# Altium PCB SAU-G0-EX_AHT-GL.PcbDoc
Units mm, origin at the board's own origin, x right, y up, seen from the top; angles counter-clockwise.
Board outline 18.66 x 19.5 mm, 2 copper layers (Top Layer, Bottom Layer), stack 0.979 mm thick; 22 components, 16 nets, 71 pads, 37 vias.
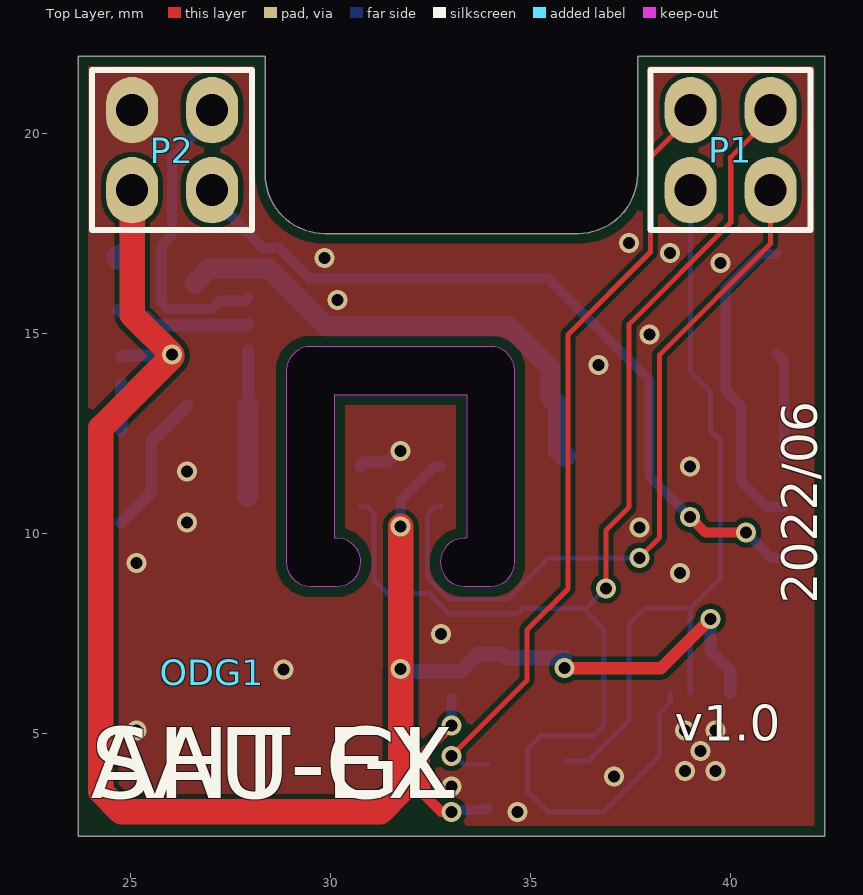
[diagram p0: Top Layer view]
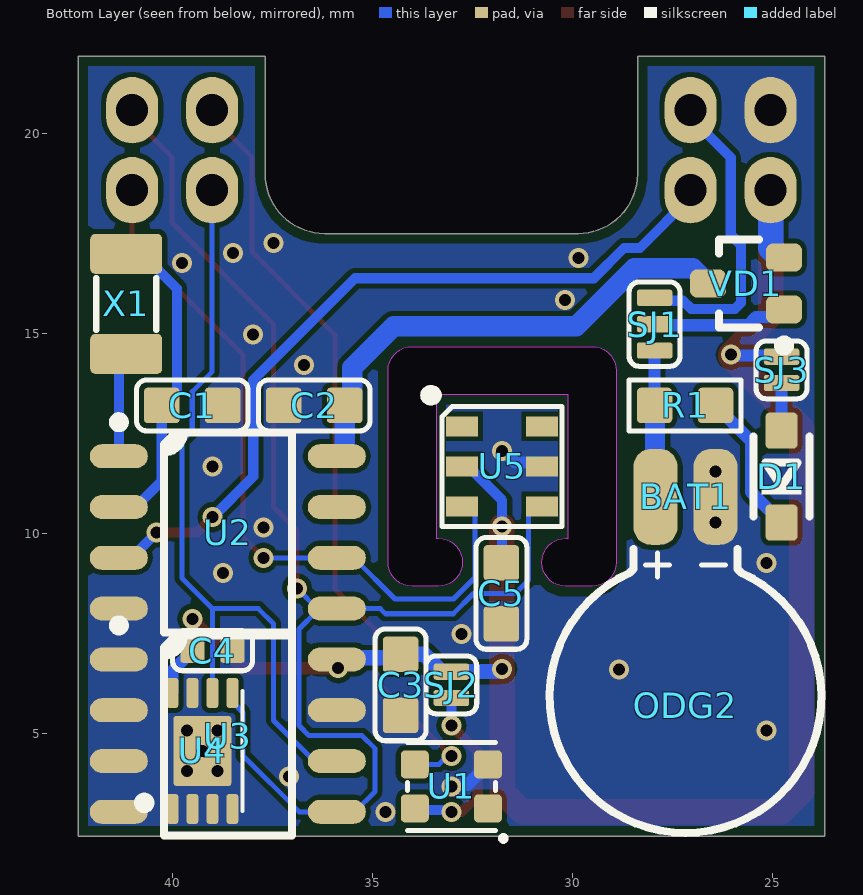
[diagram p1: Bottom Layer view, seen from below]
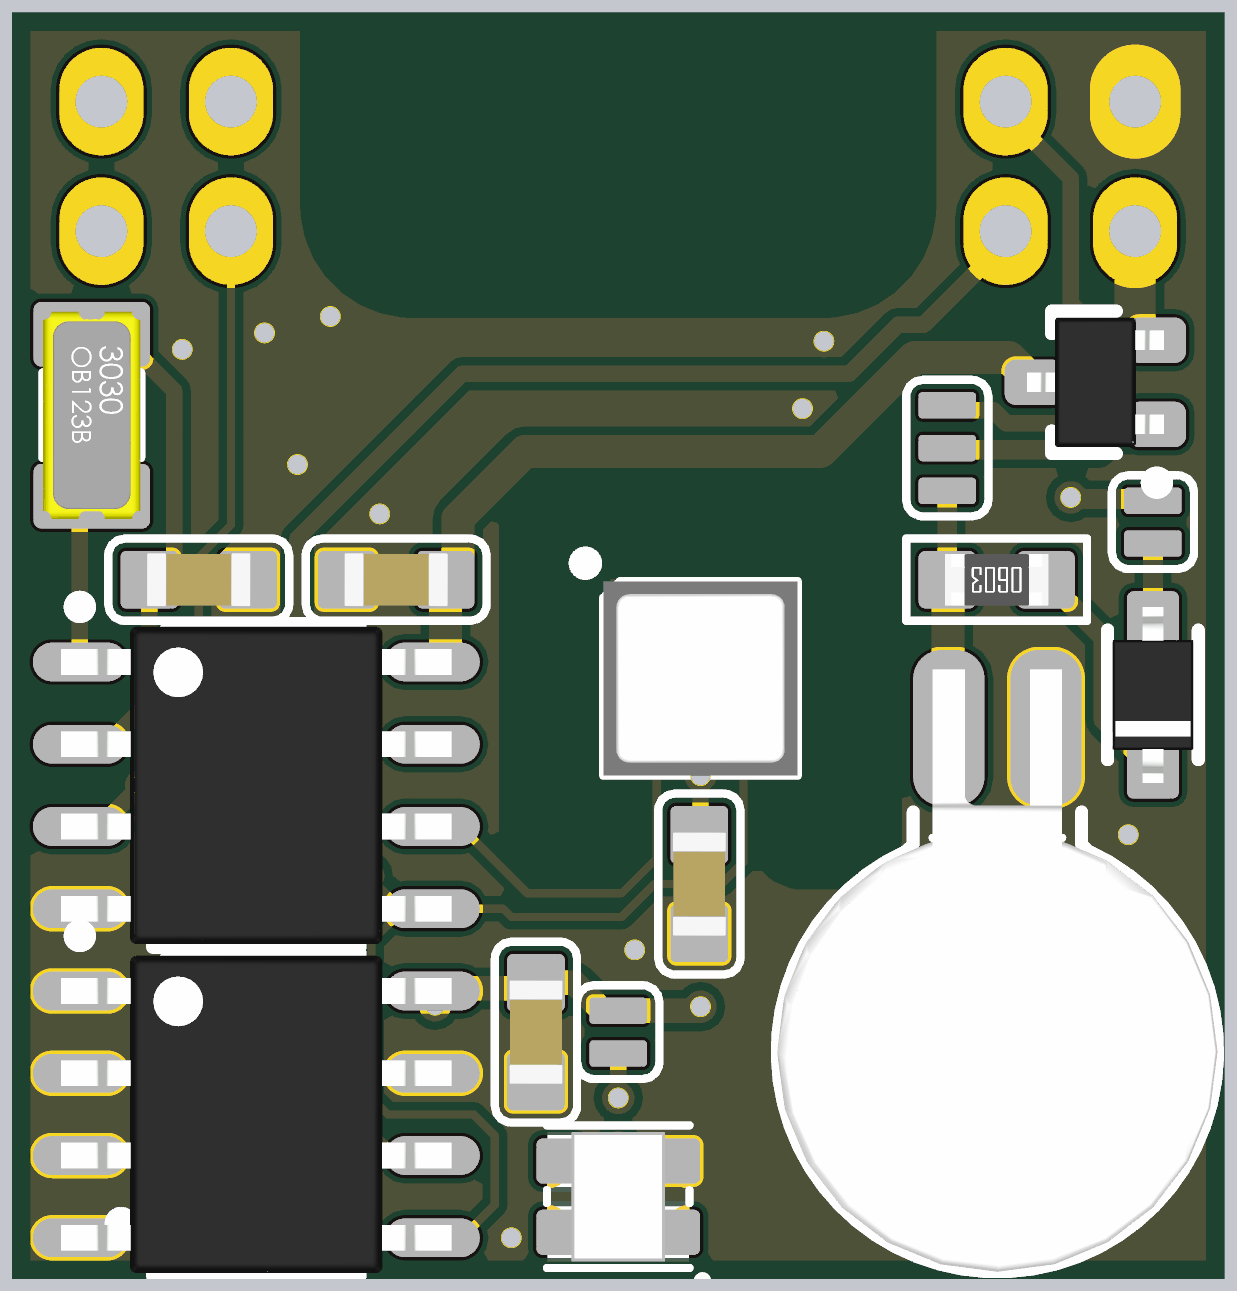
[diagram p2: 3D render of the assembled board from below, using the file's embedded part models]

## Layer stack, top to bottom
Top Solder: solder mask 0.0102, Solder Resist, Dk 3.5
Top Layer: signal copper 0.0356
Dielectric 2: prepreg 0.0711, PP-006, Dk 4.1
Dielectric 1: dielectric 0.766, FR-4, Dk 4.8
Dielectric 3: prepreg 0.0711, PP-006, Dk 4.1
Bottom Layer: signal copper 0.0356
Bottom Solder: solder mask 0.0102, Solder Resist, Dk 3.5

## Board outline
23.688,2.438 23.688,21.942 28.366,21.942 28.366,18.99 ccw(c29.85,18.99) 29.85,17.506 36.19,17.506 ccw(c36.19,18.99) 37.674,18.99 37.674,21.942 42.352,21.942 42.352,2.438
cut-out: 28.899,9.286 ccw(c29.5,9.287) 29.499,8.686 ccw(c29.499,8.763) 29.499,8.686 30.156,8.686 ccw(c30.156,8.763) 30.157,8.686 ccw(c30.156,9.287) 30.756,9.287 ccw(c30.156,9.287) 30.156,9.887 30.099,9.887 30.099,13.481 33.401,13.481 33.401,9.887 33.344,9.887 ccw(c33.344,9.287) 33.343,8.686 ccw(c33.344,9.287) 33.344,8.686 34.001,8.686 ccw(c34.001,8.763) 34.001,8.686 ccw(c34,9.287) 34.601,9.286 ccw(c34.525,9.287) 34.601,9.287 34.601,14.081 ccw(c34.525,14.081) 34.601,14.081 ccw(c34,14.08) 34.001,14.681 ccw(c34.001,14.604) 34.001,14.681 29.499,14.681 ccw(c29.499,14.604) 29.499,14.681 ccw(c29.5,14.08) 28.899,14.081 ccw(c28.975,14.081) 28.899,14.081

## Design rules (kind name [scope] priority, off if disabled: settings)
BoardOutlineClearance [All] p1: gap=0.254 ignorepadtopadclearanceinfootprint=FALSE except(0: Arc-SplitContinuation Track-SplitContinuation SMDPad-SplitContinuation THPad-SplitContinuation Via-SplitContinuation Fill-SplitContinuation Poly-SplitContinuation Region-SplitContinuation Text-SplitContinuation)
Clearance [All] p1: gap=0.127 ignorepadtopadclearanceinfootprint=FALSE except(0: Arc-Text Arc-Hole Track-Text Track-Hole SMDPad-Text SMDPad-Hole THPad-Text THPad-Hole Via-Text Via-Hole Fill-Text Fill-Hole Poly-Text Poly-Hole Region-Text Region-Hole Text-Text Text-Hole)
MinimumSolderMaskSliver [All] p1: minsoldermaskwidth=0
PlaneClearance [All] p1: clearance=0.254
PlaneConnect [All] p1: planeconnectstyle=Direct reliefexpansion=0.254 reliefentries=4 reliefconductorwidth=0.254 reliefairgap=0.254
PolygonConnect [All] p1: connectstyle=Direct reliefconductorwidth=0.254 reliefentries=4 polygonreliefangle="90 Angle" airgapwidth=0.254
RoutingVias [All] p1: holewidth=0.3 width=0.5 viastyle="Through Hole" minholewidth=0.3 minwidth=0.5 maxholewidth=5 maxwidth=5
SilkToSilkClearance [All] p1: silktosilkclearance=0
SilkToSolderMaskClearance [IsPad] p1: minsilkscreentomaskgap=0 clearancetoexposedcopper=TRUE
SolderMaskExpansion [All] p1: expansion=0.051 istentingtop=FALSE
Width [All] p1: maxlimit=2.54 minlimit=0.127 preferedwidth=0.127
25 further rules are at their usual default settings.

## Components (designator, comment, footprint, x,y, rotation, side; value= is the part's Value field where it differs from the comment)
BAT1 "BAT" MS621FE-FL11E 27.166,5.922 r90 bottom locked
C1 "6pF" C0603 39.497,13.208 r0 bottom value=0.1u
C2 "100nF" C0603 36.449,13.208 r0 bottom value=0.1u
C3 "100nF" C0603 34.29,6.223 r270 bottom value=0.1u
C4 "DNP" C0402 38.993,7.075 r180 bottom value=0.1u
C5 "100nF" C0603 31.768,8.509 r270 bottom value=0.1u
D1 "B5819WS" SOD-323 24.765,11.43 r270 bottom
ODG1 "ODG_LOGO" ODG_LOGO_soldermask 27.038,6.54 r0 top
ODG2 "ODG_LOGO" ODG_LOGO_soldermask 27.178,5.715 r180 bottom
P1 "Male" 2.0MM_MALE_2X2 40,19.59 r0 top
P2 "Male" 2.0mm_Male_2x2 26.04,19.59 r0 top
R1 "620R" R0603 27.178,13.208 r0 bottom value=22R
SJ1 "SJ_3P" SJ_3P_MINI 27.94,15.24 r270 bottom
SJ2 "SJ_2P" SJ_2P_MINI 33.02,6.223 r270 bottom
SJ3 "SJ_2P" SJ_2P_MINI 24.765,14.097 r90 bottom
U1 "WS2812" WS2812_2020 33.02,3.683 r0 bottom
U2 "PCF8563" "ANALOG DEV SOIC-8 R8" 38.608,10.033 r180 bottom locked
U3 "24Cxx_8P" "ANALOG DEV SOIC-8 R8" 38.608,4.953 r180 bottom locked
U4 "DNP_24Cxx_8P_DFN8_1EP" DFN-8-1EP_3x2mm_P0.5mm_EP1.75x1.45mm 39.243,4.572 r90 bottom
U5 "AHT20" AHT20 31.75,11.684 r180 bottom
VD1 "BAT54C" "DIODES SOT-323-3" 25.654,16.256 r0 bottom
X1 "32.768KHz" XTAL_2P_3215 41.148,15.748 r270 bottom

## Footprints (in the part's own frame and the unit in brackets; to place one, negate y for a bottom-side part, rotate by r counter-clockwise, add the part's x,y. Pads: shape width x height; smd on the part's side, far side on the other; paste and mask are expansions set on the pad)
2.0MM_MALE_2X2 [mm]
  oval 1.3x1.66 hole 0.8: 1(-1,1) 2(1,1) 3(-1,-1) 4(1,-1)
  silkscreen extent -2,-2 2,2, body extent -2,-2 2,2, height 5.7
2.0mm_Male_2x2 [mm]
  oval 1.3x1.66 hole 0.8: 1(-1,1) 2(1,1) 3(-1,-1) 4(1,-1)
  silkscreen extent -2,-2 2,2, body extent -2,-2 2,2, height 5.7
AHT20 [mm]
  rect 0.8x0.5 smd: 1(-1,1) 2(-1,0) 3(-1,-1) 4(1,-1) 5(1,0) 6(1,1)
  silkscreen extent -2.03,-1.5 1.5,2.03, body extent -1.5,-1.5 1.5,1.5, height 1
"ANALOG DEV SOIC-8 R8" [mm] "SOIC, 8-Leads, Body 4.90x3.90mm, Pitch 1.27mm, IPC Medium Density"
  oval 1.45x0.6 smd: 1(-2.725,1.905) 2(-2.725,0.635) 3(-2.725,-0.635) 4(-2.725,-1.905) 5(2.725,-1.905) 6(2.725,-0.635) 7(2.725,0.635) 8(2.725,1.905)
  silkscreen extent -2.85,-2.5 1.6,2.88, body extent -3.01,-2.45 3.01,2.45, height 1.5
C0402 [mm]
  rrect20% 0.6x0.6 smd: 1(-0.5,0) 2(0.5,0)
  silkscreen extent -1,-0.5 1,0.5, body extent -0.5,-0.26 0.5,0.26, height 0.52
C0603 [mil]
  rrect20% 35x35 smd: 1(-30,0) 2(30,0)
  silkscreen extent -55,-25 55,25, body extent -31,-16 31,16, height 32
DFN-8-1EP_3x2mm_P0.5mm_EP1.75x1.45mm [mm]
  rrect50% 0.75x0.3 smd: 1(-1.45,0.75) 2(-1.45,0.25) 3(-1.45,-0.25) 4(-1.45,-0.75) 5(1.45,-0.75) 6(1.45,-0.25) 7(1.45,0.25) 8(1.45,0.75)
  rrect10% 1.75x1.45 smd: 9(0,0)
  silkscreen extent -1.55,-1 1.5,1.71, body extent -1.5,-0.99 1.5,0.99, height 0.77
"DIODES SOT-323-3" [mm] "SOT323, 3-Leads, Body 2.00x2.10mm, Pitch 0.65mm, IPC Medium Density"
  rrect50% 0.9x0.7 smd: 1(-0.95,0.65) 2(-0.95,-0.65) 3(0.95,0)
  silkscreen extent -1.07,-1.1 0.67,1.67, body extent -1.06,-1 1.06,1, height 1
MS621FE-FL11E [mm] "3V可充电锂电池5.5mAH"
  rrect80% 2.4x1.1 smd: 1(5,0.75) 2(5,-0.75)
  silkscreen extent -3.4,-3.4 3.7,3.4, body extent -3.4,-3.4 5.9,3.4, height 2.8
ODG_LOGO_soldermask [mm]
R0603 [mil]
  rrect25% 35x35 smd: 1(-30,0) 2(30,0)
  silkscreen extent -55,-25 55,25, body extent -31,-16 31,16, height 18
SJ_2P_MINI [mil]
  rrect30% 16x35 smd: 1(-13,0) 2(13,0)
  silkscreen extent -29,-25 29,25
SJ_3P_MINI [mil]
  rrect30% 16x35 smd: 1(-26,0) 2(0,0) 3(26,0)
  silkscreen extent -42,-25 42,25
SOD-323 [mm]
  rrect25% 0.9x0.8 smd: 1(-1.15,0) 2(1.15,0)
  silkscreen extent -1,-0.7 1,0.7, body extent -1.36,-0.62 1.36,0.63, height 1.05
WS2812_2020 [mm]
  rrect30% 0.7x0.7 smd: 1(-0.915,0.55) 2(-0.915,-0.55) 3(0.915,-0.55) 4(0.915,0.55)
  silkscreen extent -1.37,-1.1 1.1,1.37, body extent -1.1,-1 1.1,1, height 0.56
XTAL_2P_3215 [mm]
  rrect25% 1x1.8 smd: 1(-1.25,0) 2(1.25,0)
  silkscreen extent -0.65,-0.75 0.65,0.75, body extent -1.6,-0.75 1.6,0.75, height 0.9

## Part data
BAT1: "锂电池", Auther=JonesLee, Publish=11-4-2017
C1 C2 C3 C4 C5: library part CAP, "Capacitor"
D1: library part DIODE, "二极管"
P1 P2: library part CONN_2X2
R1: library part RES, "Resistor"
SJ1: "焊接跳线二选一"
SJ2 SJ3: "焊接跳线"
U4: library part 24Cxx_8P_DFN8_1EP
U5: "线性稳压芯片", BOM名称=可, 学习资源=www.oooc
VD1: "贴片肖特基二极管", BOM名称=肖, 学习资源=www.oooc, 属性=30V/0.
X1: library part XTAL-2P, "2脚无源石英晶振", BOM名称=4?, 学习资源=www.oooc

## Via types
v1: diameter 0.5, hole 0.3, Top Layer to Bottom Layer, tented both sides, 37 vias

## Nets (pads, with @x,y where several pads share a name; then routed paths per layer and width w, separated by ;. In a path a pad name is that pad's centre, name@x,y a point inside that pad or via, vN(x,y) a via of type N, cw(c..) or ccw(c..) an arc to the next point about the centre after c; other vN are vias at no path point)
3V3: C3.1 C4.1 C5.1 P2.3 SJ2.1 SJ3.2 U3.8 U4.8 U5.2 VD1.2 | length 47.6
  Top Layer w0.305: v1(35.849,6.639) 38.262,6.639 v1(39.497,7.874)
  Top Layer w0.635: P2.3 25.04,15.473 v1(26.035,14.478) 26.035,14.425 24.257,12.647 24.257,3.556 24.765,3.048 31.242,3.048 31.75,3.556 v1(31.75,6.616) 31.76,6.626 31.76,10.174 v1(31.75,10.184)
  Bottom Layer w0.254: C5.1 31.75,9.289 v1(31.75,10.184) 31.75,10.834 32.6,11.684 U5.2
  Bottom Layer w0.305: SJ3.2 24.79,14.453 26.01,14.453 v1(26.035,14.478) ; v1(39.497,7.874) 39.495,7.872 39.495,7.077 C4.1 39.991,6.577 39.991,6.024 U4.8
  Bottom Layer w0.381: v1(31.75,6.616) 31.813,6.553 SJ2.1 33.261,6.553 33.693,6.985 C3.1 34.375,6.9 35.841,6.9 35.849,6.893 v1(35.849,6.639)
  Bottom Layer w0.635: VD1.2 24.804,16.906 25.04,17.142 P2.3
GND: BAT1.2 C1.1 C2.2 C3.2 C4.2 C5.2 P2.1 U1.2 U2.4 U3.1 U3.2 U3.3 U3.4 U3.7 U4.1 U4.2 U4.3 U4.4 U4.7 U4.9 U5.5 | length 2.3
  Bottom Layer w0.305: U5.5 30.848,11.782 31.414,11.782 31.697,12.065 v1(31.75,12.065) ; U1.2 32.618,3.72 32.983,3.72 v1(33.02,3.683)
  other v1: 34.671,3.048 37.084,3.937 38.862,4.064 39.624,4.064 39.243,4.572 25.146,5.08 38.862,5.08 39.624,5.08 28.829,6.604 32.766,7.493 38.735,9.017 25.146,9.271 37.719,10.16 26.416,10.287 26.416,11.557 38.989,11.684 36.703,14.224 37.973,14.986 30.175,15.85 39.751,16.764 29.845,16.891 38.481,17.018 37.465,17.272
GPIO_ndef: P2.4 U2.3 | length 19.6
  Top Layer w0.254: v1(38.989,10.414) 39.37,10.033 v1(40.386,10.033)
  Bottom Layer w0.254: P2.4 27.04,18.41 28.304,17.145 28.702,17.145 29.46,16.387 35.429,16.387 37.973,13.843 37.973,11.43 v1(38.989,10.414) ; v1(40.386,10.033) 40.842,9.577 40.842,9.558 41.002,9.398 U2.3
NetC1_2: C1.2 U2.2 X1.1 | length 7.9
  Bottom Layer w0.254: X1.1 40.748,16.998 39.878,16.128 39.878,13.589 C1.2 40.259,11.317 40.908,10.668 U2.2
NetC2_1: C2.1 U2.8 VD1.3 | length 12.5
  Bottom Layer w0.508: VD1.3 26.985,16.637 28.448,16.637 29.896,15.189 34.46,15.189 35.497,14.152 35.497,13.399 C2.1 35.687,12.078 35.828,11.938 U2.8
NetD1_1: D1.1 SJ3.1 | length 1.2
  Bottom Layer w0.305: D1.1 SJ3.1
NetD1_2: D1.2 R1.1 | length 3.6
  Bottom Layer w0.305: D1.2 25.527,11.042 25.527,12.319 R1.1
NetSJ1_2: SJ1.2 VD1.1 | length 3.4
  Bottom Layer w0.305: VD1.1 24.888,15.422 25.405,15.422 25.613,15.215 27.915,15.215 SJ1.2
NetSJ2_2: SJ2.2 U1.4 | length 4.5
  Top Layer w0.254: v1(33.02,3.048) 32.766,3.048 32.361,3.453 32.361,4.548 v1(33.02,5.207)
  Bottom Layer w0.254: v1(33.02,3.048) 33.063,3.091 33.893,3.091 U1.4 ; v1(33.02,5.207) SJ2.2
NetU2_1: U2.1 X1.2 | length 2.6
  Bottom Layer w0.254: X1.2 41.333,14.313 U2.1
PB6/MISO2: P1.3 U3.6 U4.6 | length 19.3
  Bottom Layer w0.127: U3.6 36.449,4.318 37.465,5.334 37.465,7.747 37.846,8.128 38.989,8.128 39.751,8.89 39.751,12.319 39.497,12.573 39.497,13.552 39,14.05 P1.3 ; U4.6 38.993,8.128
SCL1/SCK2: P1.4 U2.6 U5.3 | length 18.5
  Top Layer w0.127: v1(37.719,9.398) 38.227,9.906 38.227,14.478 41,17.251 P1.4
  Bottom Layer w0.127: U5.3 32.613,10.684 32.426,10.498 32.426,8.906 32.964,8.369 34.429,8.369 35.458,9.398 v1(37.719,9.398)
SDA1/MOSI2: P1.2 U2.5 U3.5 U4.5 U5.4 | length 34.2
  Top Layer w0.127: v1(36.881,8.636) 36.881,10.084 37.465,10.668 37.465,15.24 40.005,17.78 40.005,19.415 41,20.41 P1.2
  Bottom Layer w0.127: U5.4 30.9,10.684 31.087,10.498 31.087,8.846 31.424,8.509 32.464,8.509 32.972,8.001 34.671,8.001 34.798,8.128 U2.5 U2.5@36.373,8.128 ; v1(36.881,8.636) U2.5@36.373,8.128 ; U4.5 38.493,5.797 38.227,5.531 38.227,4.453 36.822,3.048 U3.5 35.433,3.048 34.925,3.556 34.925,4.625 35.253,4.953 36.576,4.953 36.83,5.207 36.83,7.62 36.373,8.077 U2.5@36.373,8.128
SPI2_NSS: P1.1 U1.3 | length 19.7
  Top Layer w0.127: v1(33.02,4.445) 34.908,6.333 34.908,7.595 35.933,8.62 35.933,14.978 38,17.045 38,19.41 39,20.41 P1.1
  Bottom Layer w0.127: v1(33.02,4.445) 33.121,4.445 33.333,4.233 U1.3 ; P1.1@39,20.51 P1.1
Vbat_button: BAT1.1 R1.2 SJ1.3 | length 3.7
  Bottom Layer w0.305: R1.2 SJ1.3
  Bottom Layer w0.508: BAT1.1 27.928,10.934 27.928,13.196 R1.2
VbatWeek: P2.2 SJ1.1 | length 7.7
  Bottom Layer w0.254: P2.2 27.04,20.41 26.035,19.405 26.035,17.473 25.781,17.219 25.781,15.77 25.93,15.621 27.026,15.621 27.229,15.824 27.864,15.824 SJ1.1
pads on no net: U1.1 U2.7 U5.1 U5.6

## Polygon pours and split planes (outlines as drawn)
GND on Top Layer "vcc-2" (solid, remove dead copper, pour order 62): 43.18,22.86 22.86,22.86 22.86,1.27 43.18,1.27
GND on Bottom Layer "vcc-2" (solid, remove dead copper, pour order 64): 43.18,22.86 22.86,22.86 22.86,1.27 43.18,1.27

## Silkscreen, mask and mechanical layers (free items; w line width, h text height)
Top Overlay:
  text "2022/06" at 42.164,8.255 h0.89 r90
  text "v1.0" at 38.608,4.826 h0.89
  text "AHT-GL" at 24.003,2.794 h3.05
  text "SAU-EX" at 24.003,2.794 h3.05
Mechanical 1:
  lines w0.152: 30.023,9.81 30.023,13.558 ; 30.023,9.81 30.156,9.81 cw(c30.156,9.287) 30.156,8.763 29.499,8.763 cw(c29.5,9.287) 28.975,9.287 28.975,14.081 cw(c29.5,14.08) 29.499,14.604 34.001,14.604 cw(c34,14.08) 34.525,14.08 34.525,9.287 cw(c34,9.287) 34.001,8.763 33.344,8.763 cw(c33.344,9.287) 33.344,9.81 33.477,9.81 33.477,13.558 30.023,13.558 ; 30.023,9.81 30.023,13.558 ; 23.688,2.438 23.688,21.942 28.366,21.942 28.366,18.99 ccw(c29.85,18.99) 29.85,17.506 36.19,17.506 ccw(c36.19,18.99) 37.674,18.99 37.674,21.942 42.352,21.942 42.352,2.438 23.688,2.438
Mechanical 2:
  lines w0.152: 23.688,12.19 42.352,12.19 ; 33.02,2.438 33.02,21.942